# EAGLE board CC2650_BLE (EAGLE 6.6.0)
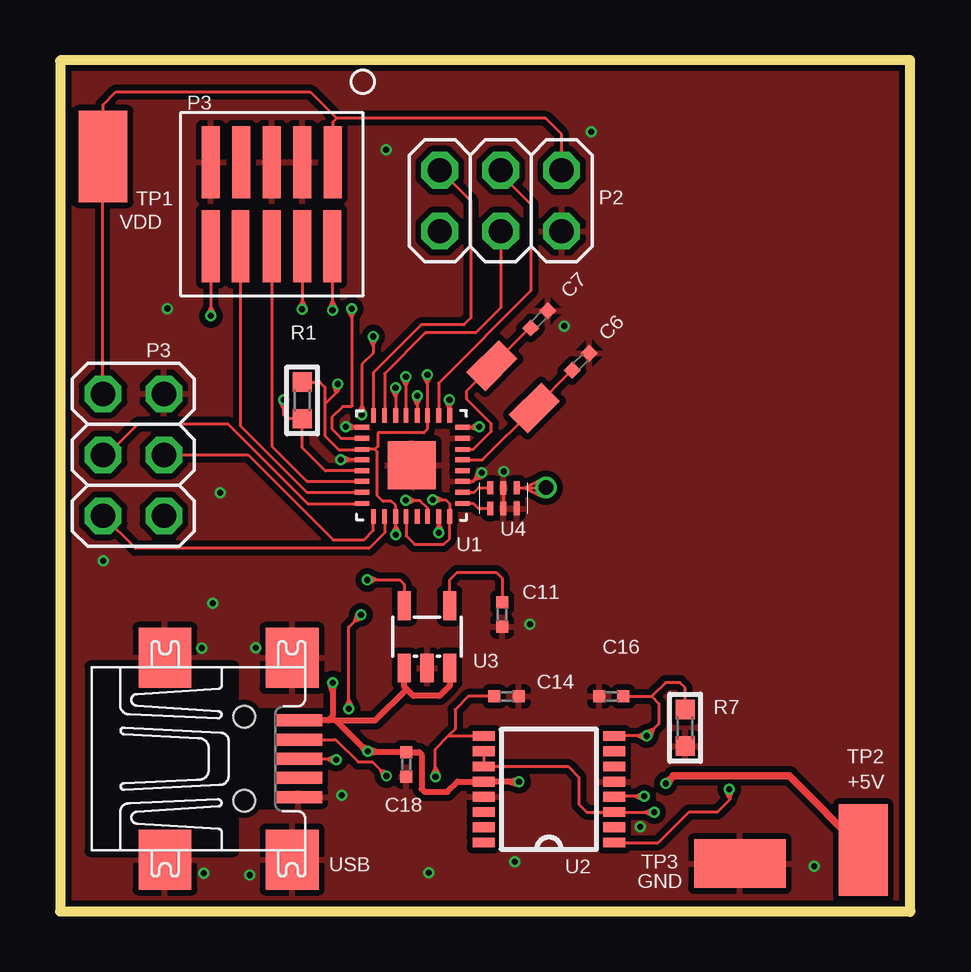
[diagram p0: board, top side]
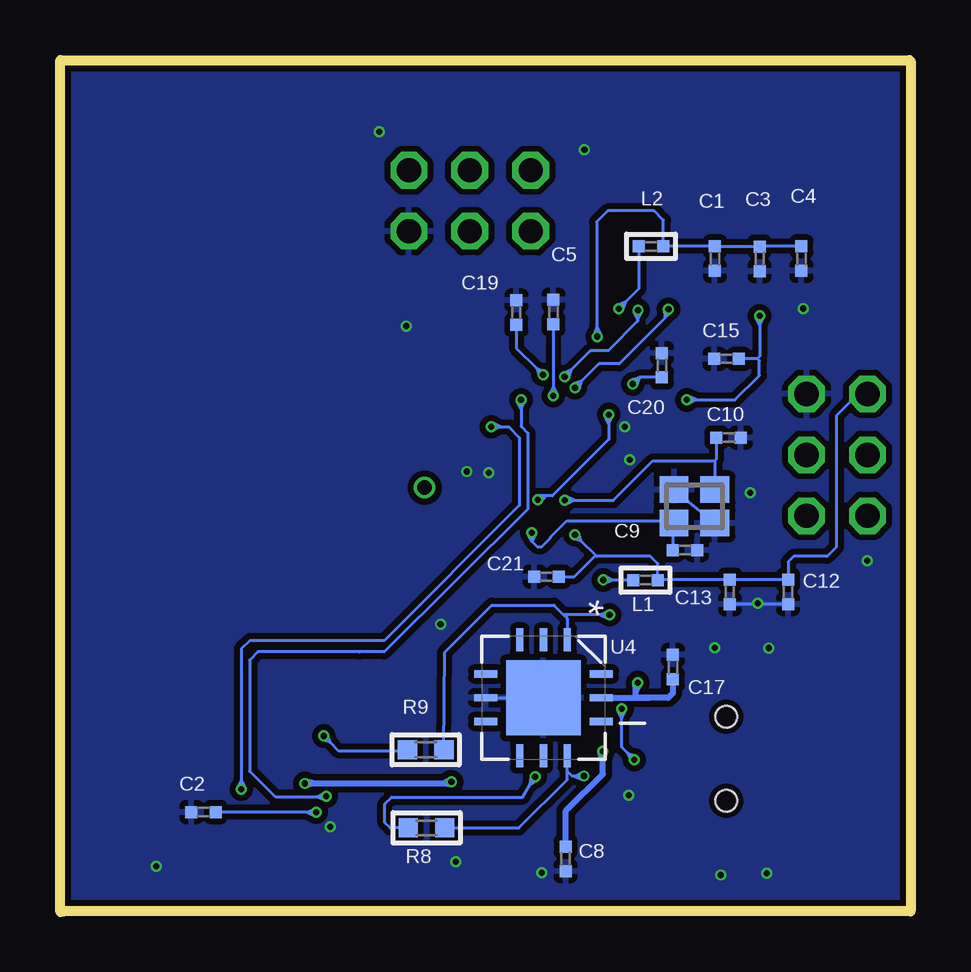
[diagram p1: board, bottom side, seen from below]

Size 35.44 x 35.5 mm. Coordinates in mm from the lower left corner, seen from the top.
Outline: 0.04,35.46 0,35.46 0,0.03 35.44,0.03 35.3,0.03 35.42,0 35.42,35.5 0.05,35.5 0.05,35.45
Copper layers (1*16): Top 0.035mm / dielectric 1.5mm / Bottom 0.035mm
Design rules "2layerOK": minimum track width 5mil, minimum drill 10mil, track to track 5mil, track to pad 5mil, pad to pad 5mil, via to via 5mil, smd to smd 5mil, copper to edge 10mil, drill to drill 5mil, minimum pad ring 4mil, minimum via ring 4mil, stop-mask expansion 3mil, vias tented up to drill 10mil, thermal gap 10mil
Net classes: 1 power: width 0.203 mm, clearance 0.127 mm

## Footprints (pad centres in the part's own frame; a part is rotated, then mirrored left to right if it is on the bottom)
FA-20H = smd 1.2 x 1.1: 1 -0.85,-0.7; 2 0.85,-0.7; 3 0.85,0.7; 4 -0.85,0.7
ABS07 = smd 1.1 x 1.9: P$1 -1.25,0; P$2 1.25,0
C0402 = smd 0.5 x 0.5: 1 -0.508,0; 2 0.508,0
L0402 = smd 0.5 x 0.5: 1 -0.508,0; 2 0.508,0
2X03 = drill 1.016 octagon: 1 -2.54,-1.27; 2 -2.54,1.27; 3 0,-1.27; 4 0,1.27; 5 2.54,-1.27; 6 2.54,1.27
R0603 = smd 0.8 x 0.8: 1 -0.762,0; 2 0.762,0
5019_PAD = smd 3.81 x 2.032: P$1 0,0
BALUNNORDIC = smd 0.55 x 0.25: P$1 -0.432,0.553; P$2 -0.427,0; P$3 -0.432,-0.55; P$4 0.432,-0.55; P$5 0.426,0; P$6 0.432,0.55
SSOP16 = smd 0.914 x 0.406: 1 -2.718,2.223; 2 -2.718,1.587; 3 -2.718,0.953; 4 -2.718,0.318; 5 -2.718,-0.318; 6 -2.718,-0.953; 7 -2.718,-1.587; 8 -2.718,-2.223; 9 2.718,-2.223; 10 2.718,-1.587; 11 2.718,-0.953; 12 2.718,-0.318; 13 2.718,0.318; 14 2.718,0.953; 15 2.718,1.587; 16 2.718,2.223
SOT23 = smd 0.55 x 1.2: 1 -0.95,-1.3; 2 0,-1.3; 3 0.95,-1.3; 4 0.95,1.3; 5 -0.95,1.3
ESD = smd 3.124 x 3.124: GND 0,0 | smd 0.965 x 0.305: IO1 -2.413,0.991; IO2 -2.413,0; IO3 -2.413,-0.991; IO4 2.413,-0.991; IO5 2.413,0; IO6 2.413,0.991 | smd 0.305 x 0.965: NC1 -0.991,2.413; NC2 0.991,2.413; NC3 0.991,-2.413; NC4 -0.991,-2.413; P2 0,-2.413; VCC 0,2.413
CC26504X4 = smd 0.6 x 0.2: P$1 -2.127,1.586; P$2 -2.127,1.126; P$3 -2.127,0.665; P$4 -2.127,0.23; P$5 -2.127,-0.23; P$6 -2.127,-0.665; P$7 -2.127,-1.126; P$8 -2.127,-1.586; P$17 2.073,-1.586; P$18 2.073,-1.126; P$19 2.073,-0.665; P$20 2.073,-0.23; P$21 2.073,0.23; P$22 2.073,0.665; P$23 2.073,1.126; P$24 2.073,1.586 | smd 0.2 x 0.6: P$9 -1.586,-2.073; P$10 -1.126,-2.073; P$11 -0.665,-2.073; P$12 -0.23,-2.073; P$13 0.23,-2.073; P$14 0.665,-2.073; P$15 1.126,-2.073; P$16 1.586,-2.073; P$25 1.586,2.127; P$26 1.126,2.127; P$27 0.665,2.127; P$28 0.23,2.127; P$29 -0.23,2.127; P$30 -0.665,2.127; P$31 -1.126,2.127; P$32 -1.586,2.127 | smd 2 x 2: P$33 0,0
FTSH-105-01-L-DV-K = smd 3 x 0.74: P$1 -1.755,2.54; P$2 -1.755,1.27; P$3 -1.755,0; P$4 -1.755,-1.27; P$5 -1.755,-2.54; P$6 1.755,2.52; P$7 1.755,1.27; P$8 1.755,0; P$9 1.755,-1.31; P$10 1.755,-2.54
UX60-MB-5ST = smd 2 x 0.5: 1 2.25,1.6; 2 2.25,0.8; 3 2.25,0; 4 2.25,-0.8; 5 2.25,-1.6 | smd 2.2 x 2.5: M1 -3.3,-4.2; M2 -3.3,4.2; M3 2,4.2; M4 2,-4.2 | hole 0.9: 0,-1.75; 0,1.75

## Placement (x,y rotation side)
24MHZ  X1  [FA-20H]  9,16.9 0 bottom
32KHZ  OSC32K  [ABS07]  18.88,21.88 315 top
C1  10u  [C0402]  8.15,27.22 90 bottom
C2  10u  [C0402]  29.46,4.16 0 bottom
C3  100n  [C0402]  6.28,27.21 90 bottom
C4  100n  [C0402]  4.54,27.22 90 bottom
C5  1u  [C0402]  14.88,25 270 bottom
C6  12pF  [C0402]  21.7,22.92 45 top
C7  12pF  [C0402]  19.97,24.69 45 top
C8  10u  [C0402]  14.37,2.21 90 bottom
C9  DNM  [C0402]  9.4,15.08 0 bottom
C10  DNM  [C0402]  7.58,19.76 0 bottom
C11  100n  [C0402]  18.42,12.39 90 top
C12  10u  [C0402]  5.1,13.33 90 bottom
C13  100n  [C0402]  7.53,13.33 90 bottom
C14  10p  [C0402]  18.61,8.98 180 top
C15  100n  [C0402]  7.66,23.05 0 bottom
C16  10p  [C0402]  22.97,8.98 0 top
C17  0.1u  [C0402]  9.9,10.2 270 bottom
C18  10n  [C0402]  14.43,6.15 270 top
C19  100n  [C0402]  16.43,24.97 270 bottom
C20  100n  [C0402]  10.36,22.78 270 bottom
C21  100n  [C0402]  15.16,13.97 0 bottom
L1  BEAD  [L0402]  11.04,13.82 180 bottom
L2  10uH  [L0402]  10.81,27.73 180 bottom
P2  [2X03]  18.36,29.63 180 top
P3  [2X03]  3.06,19.05 270 top
R1  100k  [R0603]  10.09,21.31 90 top
R7  1M  [R0603]  26.05,7.67 270 top
R8  27  [R0603]  20.16,3.5 180 bottom
R9  27  [R0603]  20.2,6.76 180 bottom
TP1  VDD  [5019_PAD]  1.79,31.48 90 top
TP2  +5V  [5019_PAD]  33.47,2.58 90 top
TP3  GND  [5019_PAD]  28.33,2.01 0 top
U1  BALUN_NRF8001  [BALUNNORDIC]  18.48,17.24 270 top
U2  FT230XS  [SSOP16]  20.37,5.11 180 top
U3  TPS732XX  [SOT23]  15.29,11.46 0 top
U4  ESD  [ESD]  15.29,8.92 270 bottom
U$3  CC26504X4  [CC26504X4]  14.65,18.61 180 top
U$5  FTSH-105-01-L-DV-K  [FTSH-105-01-L-DV-K]  8.83,29.49 270 top
USB  MINI-USB-SHIELD-UX60-MB-5ST  [UX60-MB-5ST]  7.67,6.38 0 top

## Library data of the parts
24MHZ = crystal
32KHZ = ABS07
C1-C21 L1 L2 R1 R7-R9 = rc-master-smd
P2 P3 = pinhead
TP1-TP3 = TEST_POINT_KEYSTONE_5019
U1 = 24550BM15A0002_balunNRF8001
U2 = ftdichip
U3 = TPS732xx
U4 = ESD_QFN_12
U$3 = CC2650
U$5 = Samtec
USB = usb_con-update

## Nets
+3.3RAW: L1.2 U3.5
+5V [power]: C8.2 C17.2 C18.1 TP2.P$1 U2.12 U3.1 U3.3 U4.VCC USB.1
ANTENNA: U1.P$1
CK24_N: 24MHZ.3 C10.1 U$3.P$30
CK24_P: 24MHZ.1 C9.1 U$3.P$31
CK32_Q1: 32KHZ.P$2 C6.1 U$3.P$5
CK32_Q2: 32KHZ.P$1 C7.1 U$3.P$6
D+: R9.1 U4.IO1 USB.3
D-: R8.1 U4.IO6 USB.2
DCDC_SW: L2.2 U$3.P$18
DCOUPL: C5.2 U$3.P$12
DIO_2: P2.3 U$3.P$10
DIO_3: P2.4 U$3.P$15
DIO_4: P2.5 U$3.P$16
DIO_7: P3.3 U$3.P$24
DIO_8: P3.4 U$3.P$25
DIO_9: P3.5 U$3.P$26
GND: 24MHZ.2 24MHZ.4 C1.1 C2.1 C3.1 C4.1 C5.1 C6.2 C7.2 C8.1 C9.2 C10.2 C11.1 C12.1 C13.1 C14.1 C15.1 C16.1 C17.1 C18.2 C19.1 C20.1 C21.1 P2.2 P3.2 R7.2 TP3.P$1 U1.P$2 U1.P$5 U1.P$6 U2.5 U2.13 U3.2 U4.GND U4.P2 U$3.P$3 U$3.P$7 U$3.P$17 U$3.P$20 U$3.P$33 U$5.P$2 U$5.P$3 U$5.P$5 USB.5 USB.M1 USB.M2 USB.M3 USB.M4
JTAG_TCK1: U$3.P$14 U$5.P$7
JTAG_TDI: U$3.P$23 U$5.P$9
JTAG_TDO: U$3.P$22 U$5.P$8
JTAG_TMS1: U$3.P$13 U$5.P$6
N$25: U$3.P$29
N$47: C11.2 U3.4
RESET_N: C15.2 R1.1 U$3.P$21 U$5.P$10
RF_N: U1.P$3 U$3.P$2
RF_P: U1.P$4 U$3.P$1
RX: U2.4 U$3.P$9
TX: U2.1 U$3.P$8
USB_D+: C16.2 R7.1 R9.2 U2.8
USB_D-: C14.2 R8.2 U2.9
VCCIO: C2.2 U2.3 U2.10 U2.11
VDD: C12.2 C13.2 C19.2 C20.2 C21.2 L1.1 P2.1 P3.1 R1.2 TP1.P$1 U$3.P$11 U$3.P$19 U$3.P$27 U$5.P$1
VDDR: C1.2 C3.2 C4.2 L2.1 U$3.P$28 U$3.P$32

## Tracks (layer width: path | path; a pad name or v marks a point on that pad's centre or on a via)
+3.3RAW  (via drill 0.25)
  Top 0.127: v12.8,13.83 13.18,13.83 | 13.18,13.83 14.16,13.83 14.34,13.65 U3.5 | 13.18,13.83 12.87,13.98 v12.8,13.83 | 13.18,13.83 12.87,13.68 v12.8,13.83
  Bottom 0.127: L1.2 12.42,13.82 | 12.42,13.82 12.79,13.82 v12.8,13.83 | 12.42,13.82 12.73,13.68 v12.8,13.83 | 12.42,13.82 12.72,13.98 v12.8,13.83
+5V  (via drill 0.25)
  Top 0.254: 13.2,6.65 C18.1 14.97,6.65 15.07,6.55 15.07,5.13 15.2,5 16.14,5 16.57,5.42 U2.12 18.74,5.43 | 13.2,6.65 12.81,6.65 | 12.81,6.65 12.53,6.94 | 12.53,6.94 11.49,7.98 | 11.49,7.98 11.16,7.98 | 11.16,7.98 USB.1 | U3.3 16.24,9.43 15.82,9.01 14.72,9.01 14.44,9.29 | 14.44,9.29 14.34,9.39 U3.1 | v12.82,6.69 12.83,6.63 12.81,6.65 | 11.49,7.98 13.13,7.98 14.44,9.29 | v11.36,9.56 11.36,9.18 | 11.36,9.18 11.36,8.18 11.16,7.98 | 25.56,5.67 25.51,5.62 | 25.51,5.62 v25.24,5.35 | v19.13,5.43 18.74,5.43 | 13.2,6.65 12.86,6.78 v12.82,6.69 | 13.2,6.65 12.84,6.59 v12.82,6.69 | 12.53,6.94 12.74,6.63 v12.82,6.69 | 12.53,6.94 12.86,6.78 v12.82,6.69 | 11.36,9.18 11.46,9.53 v11.36,9.56 | 11.36,9.18 11.26,9.53 v11.36,9.56 | 25.51,5.62 25.19,5.44 v25.24,5.35 | 25.51,5.62 25.33,5.3 v25.24,5.35 | 18.74,5.43 19.1,5.33 v19.13,5.43 | 18.74,5.43 19.1,5.53 v19.13,5.43
  Top 0.305: 25.56,5.67 30.38,5.67 TP2.P$1
  Bottom 0.254: U4.VCC 11.44,8.92 | 11.44,8.92 10.89,8.92 | C8.2 14.36,4.21 12.82,5.74 12.82,6.31 | 12.82,6.31 v12.82,6.69 | C17.2 9.9,9.12 10.1,8.92 11.44,8.92 | 11.44,8.92 11.44,9.18 | 11.44,9.18 11.44,9.48 v11.36,9.56 | v25.24,5.35 24.86,5.35 | 24.86,5.35 19.5,5.35 | 19.5,5.35 19.2,5.35 v19.13,5.43 | 12.82,6.31 12.92,6.66 v12.82,6.69 | 12.82,6.31 12.72,6.66 v12.82,6.69 | 11.44,9.18 11.46,9.55 v11.36,9.56 | 11.44,9.18 11.27,9.51 v11.36,9.56 | 24.86,5.35 25.21,5.25 v25.24,5.35 | 24.86,5.35 25.21,5.45 v25.24,5.35 | 19.5,5.35 19.17,5.52 v19.13,5.43 | 19.5,5.35 19.13,5.33 v19.13,5.43
ANTENNA  (via drill 0.6)
  Top 0.127: U1.P$1 19.35,17.67 | 19.35,17.67 v20.25,17.67 v20.25,17.68 | 19.35,17.67 20.08,17.33 v20.25,17.68 | 19.35,17.67 20.08,18.03 v20.25,17.68
CK24_N  (via drill 0.25)
  Top 0.127: U$3.P$30 15.31,16.82 15,17.14 14.78,17.14 | 14.78,17.14 v14.41,17.14 v14.4,17.14 | 14.78,17.14 14.47,17.29 v14.4,17.14 | 14.78,17.14 14.47,17 v14.4,17.14
  Bottom 0.127: v14.4,17.14 14.02,17.14 | 14.02,17.14 12.38,17.14 10.73,18.8 8.16,18.8 8.15,18.79 | 8.15,18.79 24MHZ.3 | C10.1 8.08,18.86 8.15,18.79 | 14.02,17.14 14.33,17 v14.4,17.14 | 14.02,17.14 14.33,17.29 v14.4,17.14
CK24_P  (via drill 0.25)
  Top 0.127: U$3.P$31 15.78,16.18 | 15.78,16.18 v15.78,15.8 | 15.78,16.18 15.63,15.87 v15.78,15.8 | 15.78,16.18 15.92,15.87 v15.78,15.8
  Bottom 0.127: v15.78,15.8 15.78,15.44 15.76,15.42 | 15.76,15.42 15.56,15.23 15.36,15.23 14.99,15.6 14.99,15.62 14.32,16.29 9.94,16.29 | 9.94,16.29 24MHZ.1 | 9.94,16.29 9.91,16.29 C9.1 | 15.76,15.42 15.92,15.72 v15.78,15.8 | 15.76,15.42 15.62,15.74 v15.78,15.8
CK32_Q1
  Top 0.127: U$3.P$5 17.6,18.84 32KHZ.P$2 21.33,22.56 C6.1
CK32_Q2
  Top 0.127: U$3.P$6 17.22,19.27 17.97,20.03 17.97,20.34 16.94,21.36 16.94,21.71 17.07,21.84 | 17.07,21.84 | 17.07,21.84 32KHZ.P$1 19.56,24.33 C7.1
D+  (via drill 0.25)
  Top 0.127: USB.3 11.13,6.38 | 11.13,6.38 11.47,6.38 v11.51,6.34 | v12.02,8.46 12.02,8.84 | 12.02,8.84 12.02,11.86 12.27,12.11 | 12.27,12.11 v12.54,12.38 | 11.13,6.38 11.42,6.2 v11.51,6.34 | 11.13,6.38 11.45,6.5 v11.51,6.34 | 12.02,8.84 11.88,8.53 v12.02,8.46 | 12.02,8.84 12.17,8.53 v12.02,8.46 | 12.27,12.11 12.6,12.23 v12.54,12.38 | 12.27,12.11 12.39,12.44 v12.54,12.38
  Bottom 0.127: R9.1 19.42,10.81 17.44,12.79 14.86,12.79 14.46,12.38 | 14.46,12.38 14.3,12.23 U4.IO1 | v11.51,6.34 | v11.51,6.34 11.78,6.61 | 11.78,6.61 12.03,6.87 12.03,8.08 | 12.03,8.08 12.03,8.43 v12.02,8.46 | v12.54,12.38 12.92,12.38 | 12.92,12.38 14.46,12.38 | 11.78,6.61 11.45,6.5 v11.51,6.34 | 11.78,6.61 11.66,6.29 v11.51,6.34 | 12.03,8.08 12.17,8.39 v12.02,8.46 | 12.03,8.08 11.88,8.38 v12.02,8.46 | 12.92,12.38 12.61,12.53 v12.54,12.38 | 12.92,12.38 12.61,12.23 v12.54,12.38
D-  (via drill 0.25)
  Top 0.127: USB.2 11.49,7.18 12.42,6.25 13.02,6.25 13.34,5.93 | 13.34,5.93 v13.6,5.66 | 13.34,5.93 13.45,5.61 v13.6,5.66 | 13.34,5.93 13.66,5.82 v13.6,5.66
  Bottom 0.127: R8.1 16.31,3.5 14.3,5.52 14.3,5.86 | 14.3,5.86 U4.IO6 | v13.6,5.66 13.99,5.66 | 13.99,5.66 14.1,5.66 14.3,5.86 | 13.99,5.66 13.68,5.81 v13.6,5.66 | 13.99,5.66 13.68,5.51 v13.6,5.66
DCDC_SW  (via drill 0.25)
  Top 0.127: v12.16,25.13 12.16,24.75 | 12.16,24.75 12.15,21.05 11.77,21.05 11.33,20.61 11.33,20.12 11.72,19.73 U$3.P$18 | 12.16,24.75 12.31,25.06 v12.16,25.13 | 12.16,24.75 12.01,25.06 v12.16,25.13
  Bottom 0.127: L2.2 11.32,25.97 11.89,25.4 | 11.89,25.4 v12.16,25.13 | 11.89,25.4 12.01,25.07 v12.16,25.13 | 11.89,25.4 12.22,25.28 v12.16,25.13
DCOUPL  (via drill 0.25)
  Top 0.127: v14.88,21.5 14.88,21.12 | 14.88,21.12 U$3.P$12 | 14.88,21.12 15.03,21.43 v14.88,21.5 | 14.88,21.12 14.73,21.43 v14.88,21.5
  Bottom 0.127: 14.88,21.88 C5.2 | 14.88,21.88 v14.88,21.5 | 14.88,21.88 14.73,21.57 v14.88,21.5 | 14.88,21.88 15.03,21.57 v14.88,21.5
DIO_2
  Top 0.127: P2.3 18.36,30.74 19.62,29.48 19.62,25.88 15.77,22.03 U$3.P$10
DIO_3
  Top 0.127: P2.4 18.36,25.18 17.31,24.12 15.22,24.12 13.53,22.43 U$3.P$15
DIO_4
  Top 0.127: P2.5 15.85,30.9 17.12,29.63 17.12,24.75 16.83,24.46 15.04,24.46 13.06,22.48 U$3.P$16
DIO_7
  Top 0.127: P3.3 1.97,19.05 3.26,20.34 7,20.34 10.32,17.01 12.57,17.01 U$3.P$24
DIO_8
  Top 0.127: P3.4 7.83,19.05 11.38,15.5 12.67,15.5 13.06,15.89 U$3.P$25
DIO_9
  Top 0.127: U$3.P$26 13.52,15.79 12.88,15.15 3.15,15.15 P3.5
GND  (via drill 0.25)
  Top 0.127: U1.P$2 U1.P$5 | U2.13 | U$3.P$20 12.08,18.84 | 12.08,18.84 11.72,18.84 11.7,18.86 | U$3.P$17 12.28,20.19 | 12.28,20.19 11.93,20.19 v11.91,20.21 | U$3.P$3 17.22,17.94 17.3,18.02 | 17.3,18.02 v17.57,18.29 | v11.7,18.84 11.74,18.84 11.76,18.82 | 12.08,18.84 11.77,18.99 v11.7,18.84 | 12.08,18.84 11.77,18.69 v11.7,18.84 | 12.28,20.19 11.98,20.35 v11.9,20.21 11.97,20.06 12.28,20.19 | 17.3,18.02 17.63,18.14 v17.57,18.29 | 17.3,18.02 17.42,18.35 v17.57,18.29
  Bottom 0.127: U4.P2 U4.GND | C12.1 C13.1 | 24MHZ.2 24MHZ.4
  other vias: 18.49,18.35 5.9,11 8.15,11.01 6,1.6 7.9,1.54 11.74,4.86 6.37,12.86 19.58,11.98 15.37,1.64 18.95,2.09 24.18,3.54 31.42,1.91 6.68,17.46 1.8,14.63 4.48,25.14 13.58,31.77 21.02,24.41 22.13,32.51
  pour Bottom (isolate 0.254): 0.06,35.16 0.06,-0.06 35.42,-0.06 35.42,34.82 35.42,34.82 35.42,35.4 0.07,35.4
  pour Top (isolate 0.254): 0.07,35.16 0.07,-0.06 35.42,-0.06 35.42,34.82 35.42,34.83 35.42,35.41 0.07,35.4
JTAG_TCK1  (via drill 0.25)
  Top 0.127: U$5.P$7 10.1,25.49 | 10.1,25.49 10.1,25.12 v10.08,25.1 | v13.98,21.84 13.98,21.46 | 13.98,21.46 U$3.P$14 | 10.1,25.49 9.94,25.18 v10.08,25.1 | 10.1,25.49 10.24,25.17 v10.08,25.1 | 13.98,21.46 14.13,21.77 v13.98,21.84 | 13.98,21.46 13.83,21.77 v13.98,21.84
  Bottom 0.127: v10.08,25.1 10.08,24.89 10.23,24.75 | 10.23,24.75 12.14,22.84 12.99,22.84 13.71,22.11 | 13.71,22.11 v13.98,21.84 | 10.23,24.75 10.25,25.09 v10.08,25.1 | 10.23,24.75 9.97,24.98 v10.08,25.1 | 13.71,22.11 13.82,21.79 v13.98,21.84 | 13.71,22.11 14.03,22 v13.98,21.84
JTAG_TDI
  Top 0.127: U$5.P$9 7.52,20.25 10.29,17.48 U$3.P$23 | U$3.P$23
JTAG_TDO
  Top 0.127: U$5.P$8 8.83,19.41 10.29,17.95 U$3.P$22
JTAG_TMS1  (via drill 0.25)
  Top 0.127: U$5.P$6 11.35,25.46 | 11.35,25.46 v11.35,25.08 v11.36,25.07 | v14.42,22.3 14.42,21.92 | 14.42,21.92 U$3.P$13 | 11.35,25.46 11.2,25.14 v11.36,25.07 | 11.35,25.46 11.5,25.15 v11.36,25.07 | 14.42,21.92 14.56,22.23 v14.42,22.3 | 14.42,21.92 14.27,22.23 v14.42,22.3
  Bottom 0.127: v11.36,25.07 11.36,24.69 | 11.36,24.69 11.36,24.63 12.6,23.38 13.34,23.38 14.15,22.57 | 14.15,22.57 v14.42,22.3 | 11.36,24.69 11.5,25 v11.36,25.07 | 11.36,24.69 11.21,25 v11.36,25.07 | 14.15,22.57 14.26,22.24 v14.42,22.3 | 14.15,22.57 14.47,22.45 v14.42,22.3
N$47
  Top 0.127: U3.4 16.24,13.84 16.55,14.15 18.17,14.15 18.42,13.9 C11.2
RESET_N  (via drill 0.25)
  Top 0.127: U$3.P$21 11.05,18.38 10.1,19.33 R1.1 | R1.1 | U$5.P$10 6.29,25.21 | 6.29,25.21 v6.29,24.84 v6.29,24.83 | R1.1 9.46,20.55 9.32,20.7 9.32,20.95 | 9.32,20.95 v9.32,21.33 | 6.29,25.21 6.14,24.9 v6.29,24.83 | 6.29,25.21 6.44,24.91 v6.29,24.83 | 9.32,20.95 9.47,21.26 v9.32,21.33 | 9.32,20.95 9.17,21.26 v9.32,21.33
  Bottom 0.127: v6.29,24.83 6.29,24.45 | 6.29,24.45 6.29,23.15 6.38,23.05 | 6.38,23.05 C15.2 | v9.32,21.33 8.94,21.33 | 8.94,21.33 7.32,21.33 6.3,22.35 6.3,22.97 6.38,23.05 | 6.29,24.45 6.44,24.76 v6.29,24.83 | 6.29,24.45 6.14,24.76 v6.29,24.83 | 8.94,21.33 9.25,21.18 v9.32,21.33 | 8.94,21.33 9.25,21.48 v9.32,21.33
RF_N
  Top 0.127: U$3.P$2 17.26,17.49 17.45,17.68 U1.P$3
RF_P
  Top 0.127: U$3.P$1 17.23,17.02 17.44,16.81 U1.P$4
RX  (via drill 0.25)
  Top 0.127: U$3.P$9 16.24,20.63 16.23,20.62 16.23,20.96 | 16.23,20.96 v16.23,21.34 | v24.34,4.82 23.96,4.82 | 23.96,4.82 23.12,4.82 U2.4 | 16.23,20.96 16.38,21.26 v16.23,21.34 | 16.23,20.96 16.08,21.26 v16.23,21.34 | 23.96,4.82 24.27,4.67 v24.34,4.82 | 23.96,4.82 24.27,4.97 v24.34,4.82
  Bottom 0.127: v16.23,21.34 16.23,20.96 | 16.23,20.96 16.23,20.24 15.94,19.95 15.94,16.78 21.93,10.84 22.98,10.84 22.94,10.84 27.19,10.84 27.53,10.5 27.53,5.86 26.48,4.8 24.72,4.8 | 24.72,4.8 24.37,4.8 v24.34,4.82 | 16.23,20.96 16.38,21.26 v16.23,21.34 | 16.23,20.96 16.08,21.26 v16.23,21.34 | 24.72,4.8 24.42,4.97 v24.34,4.82 | 24.72,4.8 24.41,4.67 v24.34,4.82
TX  (via drill 0.25)
  Top 0.127: U2.1 24.93,2.89 26.2,4.16 27.39,4.16 27.9,4.67 27.9,4.72 | U$3.P$8 17.09,20.19 | 17.09,20.19 17.37,20.19 v17.47,20.22 | v27.89,5.1 27.9,4.72 | 17.09,20.19 17.4,20.07 v17.47,20.22 | 17.09,20.19 17.38,20.36 v17.47,20.22 | 27.9,4.72 28.04,5.04 v27.89,5.1 | 27.9,4.72 27.74,5.03 v27.89,5.1
  Bottom 0.127: v17.47,20.22 16.74,20.21 16.3,19.77 16.3,16.94 21.93,11.3 23.17,11.3 23.16,11.31 27.53,11.31 27.88,10.96 v27.89,5.11 v27.89,5.1 | v17.47,20.22 17.4,20.07 17.08,20.21 17.39,20.37 v17.47,20.22 | v27.89,5.1 27.74,5.18 27.89,5.49 28.04,5.18 v27.89,5.1
USB_D+  (via drill 0.25)
  Top 0.127: v24.45,7.33 24.07,7.33 | 24.07,7.33 U2.8 | C16.2 24.65,8.98 | 24.65,8.98 24.95,8.68 24.95,7.83 24.72,7.6 | 24.72,7.6 v24.45,7.33 | R7.1 26.05,9.34 25.83,9.56 25.23,9.56 24.65,8.98 | 24.07,7.33 24.38,7.18 v24.45,7.33 | 24.07,7.33 24.38,7.48 v24.45,7.33 | 24.72,7.6 24.39,7.49 v24.45,7.33 | 24.72,7.6 24.6,7.28 v24.45,7.33
  Bottom 0.127: R9.2 20.86,6.7 23.82,6.7 24.18,7.06 | 24.18,7.06 v24.45,7.33 | 24.18,7.06 24.5,7.18 v24.45,7.33 | 24.18,7.06 24.29,7.39 v24.45,7.33
USB_D-  (via drill 0.25)
  Top 0.127: v15.65,5.64 15.65,6.79 16.18,7.33 | 16.18,7.33 U2.9 | C14.2 17.02,8.98 16.46,8.43 16.46,7.61 16.18,7.33 | v15.65,5.64 15.5,5.71 15.65,6.02 15.79,5.71 v15.65,5.64
  Bottom 0.127: R8.2 21.69,3.5 21.9,3.72 21.9,4.5 21.62,4.79 16.15,4.79 15.84,5.31 | 15.84,5.31 v15.65,5.64 | 15.84,5.31 15.81,5.65 v15.65,5.64 | 15.84,5.31 15.55,5.5 v15.65,5.64
VCCIO  (via drill 0.25)
  Top 0.127: U2.10 U2.11 21.17,6.06 21.62,5.61 21.62,4.48 21.94,4.16 U2.3 24.38,4.16 | 24.38,4.16 v24.75,4.16 v24.76,4.16 | 24.38,4.16 24.68,4.01 v24.76,4.16 | 24.38,4.16 24.69,4.31 v24.76,4.16
  Bottom 0.127: v24.76,4.16 25.14,4.16 | 25.14,4.16 C2.2 | 25.14,4.16 24.83,4.31 v24.76,4.16 | 25.14,4.16 24.83,4.01 v24.76,4.16
VDD  (via drill 0.25)
  Top 0.127: v13.98,15.71 13.98,16.09 | 13.98,16.09 U$3.P$27 13.98,16.94 13.81,17.11 13.45,17.11 13.22,17.34 13.22,19.17 13.12,19.27 | P2.1 20.9,32.4 20.24,33.06 11.53,33.06 | 11.53,33.06 11.36,32.9 U$5.P$1 | P3.1 TP1.P$1 1.79,33.63 2.33,34.17 10.42,34.17 11.53,33.06 | R1.2 10.82,22.08 11.04,21.86 11.04,21.16 | 11.04,21.16 11.04,19.84 11.61,19.27 U$3.P$19 13.12,19.27 | v15.31,22.38 15.31,22 | 15.31,22 U$3.P$11 | U$3.P$11 | v11.58,22 11.58,21.69 11.5,21.62 | 11.5,21.62 11.04,21.16 | U$3.P$11 15.31,20.12 15.16,19.96 13.27,19.96 13.25,19.94 13.25,19.39 13.12,19.27 | 13.98,16.09 13.83,15.78 v13.98,15.71 | 13.98,16.09 14.13,15.78 v13.98,15.71 | 15.31,22 15.46,22.31 v15.31,22.38 | 15.31,22 15.16,22.31 v15.31,22.38 | 11.5,21.62 11.71,21.9 v11.58,22 | 11.5,21.62 11.42,21.95 v11.58,22
  Bottom 0.127: 13.12,14.85 13.09,14.82 10.84,14.82 10.53,14.51 L1.1 10.53,13.84 C13.2 C12.2 5.1,14.58 4.87,14.81 3.47,14.81 3.09,15.2 3.09,20.67 2.17,21.59 P3.1 | 13.12,14.85 13.71,15.44 | 13.71,15.44 v13.98,15.71 | C19.2 16.43,23.49 15.58,22.65 | 15.58,22.65 v15.31,22.38 | C20.2 11.3,22.27 11.31,22.27 | 11.31,22.27 v11.58,22 | C21.2 14.01,13.97 13.12,14.85 | 13.71,15.44 14.04,15.56 v13.98,15.71 | 13.71,15.44 13.83,15.77 v13.98,15.71 | 15.58,22.65 15.26,22.53 v15.31,22.38 | 15.58,22.65 15.47,22.32 v15.31,22.38 | 11.31,22.27 11.42,21.94 v11.58,22 | 11.31,22.27 11.63,22.15 v11.58,22
VDDR  (via drill 0.25)
  Top 0.127: U$3.P$28 14.42,15.67 14.78,15.31 15.98,15.31 16.23,15.56 U$3.P$32 16.24,17.01 16.07,17.17 15.91,17.17 | v13.05,23.97 13.05,23.59 | 13.05,23.59 13.05,23.28 12.58,22.81 12.58,21.1 | 12.58,21.1 12.58,20.73 v12.57,20.72 | v15.53,17.17 15.91,17.17 | 13.05,23.59 13.2,23.9 v13.05,23.97 | 13.05,23.59 12.9,23.9 v13.05,23.97 | 12.58,21.1 12.42,20.8 v12.57,20.72 | 12.58,21.1 12.72,20.79 v12.57,20.72 | 15.91,17.17 15.6,17.32 v15.53,17.17 | 15.91,17.17 15.6,17.02 v15.53,17.17
  Bottom 0.127: C4.2 C3.2 8.14,27.72 C1.2 L2.1 | L2.1 | L2.1 10.3,28.83 10.69,29.21 12.61,29.21 13.08,28.75 13.08,24.35 | 13.08,24.35 13.08,24.12 v13.05,23.97 | v12.57,20.72 12.57,20.34 | 12.57,20.34 12.57,19.69 14.92,17.33 15.18,17.33 | 15.18,17.33 15.37,17.33 v15.53,17.17 | 13.08,24.35 12.9,24.06 v13.05,23.97 | 13.08,24.35 13.2,24.03 v13.05,23.97 | 12.57,20.34 12.72,20.65 v12.57,20.72 | 12.57,20.34 12.42,20.65 v12.57,20.72 | 15.18,17.33 15.4,17.06 v15.53,17.17 | 15.18,17.33 15.53,17.33 v15.53,17.17

## Text on the board
tPlace: P3 | U1
tNames: U4